# EAGLE board cap_touch_input (EAGLE 5.06)
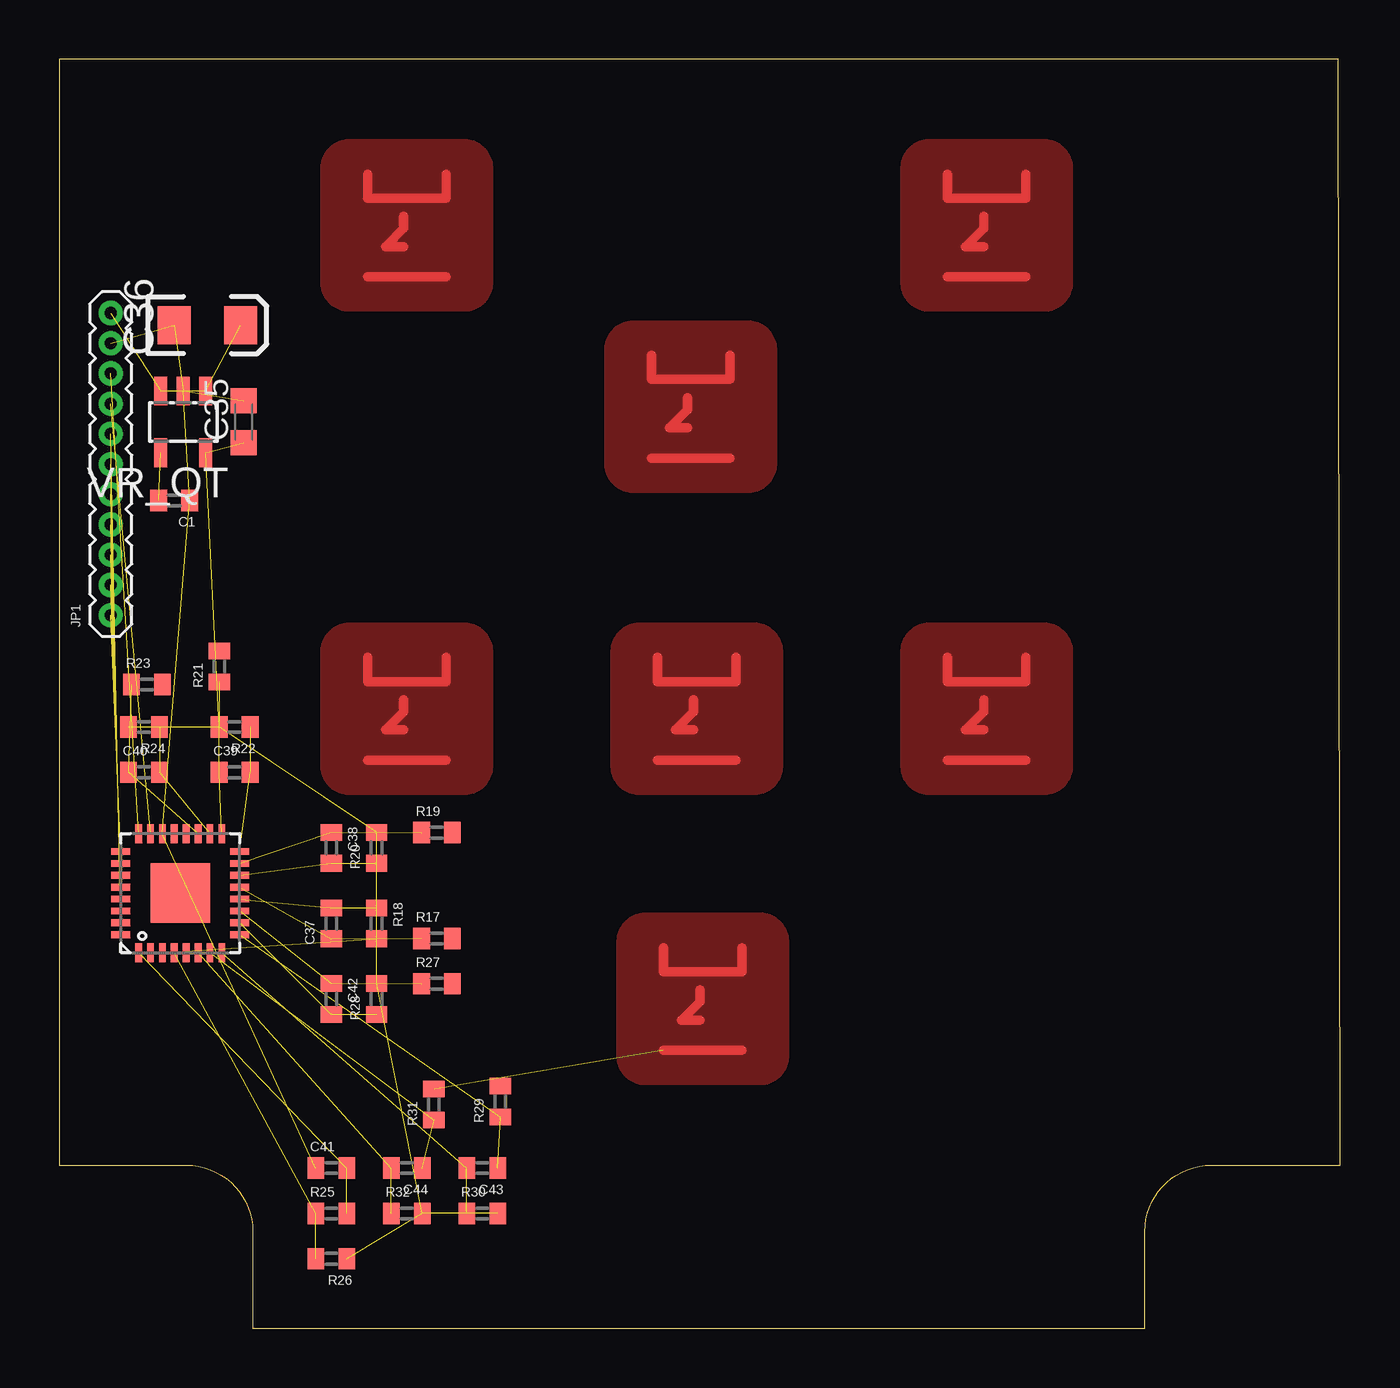
[diagram p0: board, top side]

Size 53.85 x 53.33 mm. Coordinates in mm from the lower left corner, seen from the top.
Outline: 8.13,0 45.64,0 45.64,4.06 arc-90 48.44,6.86 53.85,6.86 53.77,53.33 0,53.33 0,6.86 5.33,6.86 arc-90 8.13,4.06 8.13,0
Copper layers (1*16): Top 0.035mm / dielectric 1.5mm / Bottom 0.035mm
Design rules "default *": minimum track width 10mil, minimum drill 24mil, track to track 8mil, track to pad 8mil, pad to pad 8mil, via to via 8mil, smd to smd 8mil, copper to edge 20mil, drill to drill 8mil, minimum pad ring 10mil, minimum via ring 8mil, stop-mask expansion 4mil, vias tented up to drill 0mil, thermal gap 10mil

## Footprints (pad centres in the part's own frame; a part is rotated, then mirrored left to right if it is on the bottom)
C0402 = smd 0.7 x 0.9: 1 -0.65,0; 2 0.65,0
C0603K = smd 1.05 x 1.08: 1 -0.875,0; 2 0.875,0
EIA3216 = smd 1.4 x 1.6: A 1.4,0; C -1.4,0
QFN-32 = smd 0.285 x 0.8: 1 -1.75,-2.5; 2 -1.25,-2.5; 3 -0.75,-2.5; 4 -0.25,-2.5; 5 0.25,-2.5; 6 0.75,-2.5; 7 1.25,-2.5; 8 1.75,-2.5; 17 1.75,2.5; 18 1.25,2.5; 19 0.75,2.5; 20 0.25,2.5; 21 -0.25,2.5; 22 -0.75,2.5; 23 -1.25,2.5; 24 -1.75,2.5 | smd 0.8 x 0.285: 9 2.5,-1.75; 10 2.5,-1.25; 11 2.5,-0.75; 12 2.5,-0.25; 13 2.5,0.25; 14 2.5,0.75; 15 2.5,1.25; 16 2.5,1.75; 25 -2.5,1.75; 26 -2.5,1.25; 27 -2.5,0.75; 28 -2.5,0.25; 29 -2.5,-0.25; 30 -2.5,-0.75; 31 -2.5,-1.25; 32 -2.5,-1.75 | smd 2.5 x 2.5: BACKPLANE 0,0
1X11-1.27MM = drill 0.508 pad 1 round: 1 0,0; 2 1.27,0; 3 2.54,0; 4 3.81,0; 5 5.08,0; 6 6.35,0; 7 7.62,0; 8 8.89,0; 9 10.16,0; 10 11.43,0; 11 12.7,0
SOT23-5 = smd 0.55 x 1.2: 1 -0.95,-1.3; 2 0,-1.3; 3 0.95,-1.3; 4 0.95,1.3; 5 -0.95,1.3

## Placement (x,y rotation side)
C1  470pF  [C0402]  4.83,34.8 180 top
C35  2.2uF (TANT)  [C0603K]  7.75,38.1 90 top
C36  10uF  [EIA3216]  6.22,42.16 0 top
C37  1nF  [C0402]  11.43,17.02 90 top
C38  1nF  [C0402]  11.43,20.19 270 top
C39  1nF  [C0402]  7.37,23.37 0 top
C40  1nF  [C0402]  3.56,23.37 0 top
C41  1nF  [C0402]  11.43,6.73 0 top
C42  1nF  [C0402]  11.43,13.84 270 top
C43  1nF  [C0402]  17.78,6.73 180 top
C44  1nF  [C0402]  14.61,6.73 180 top
IC1  QT1081  [QFN-32]  5.08,18.29 0 top
JP1  M111.27MM  [1X11-1.27MM]  2.16,29.97 90 top
R17  10K  [C0402]  15.88,16.38 0 top
R18  1M  [C0402]  13.34,17.02 270 top
R19  10K  [C0402]  15.88,20.83 0 top
R20  1M  [C0402]  13.34,20.19 90 top
R21  10K  [C0402]  6.73,27.81 90 top
R22  1M  [C0402]  7.37,25.27 180 top
R23  10K  [C0402]  3.68,27.05 0 top
R24  1M  [C0402]  3.56,25.27 180 top
R25  1M  [C0402]  11.43,4.83 0 top
R26  1M  [C0402]  11.43,2.92 180 top
R27  10K  [C0402]  15.88,14.48 0 top
R28  1M  [C0402]  13.34,13.84 90 top
R29  10K  [C0402]  18.54,9.53 90 top
R30  1M  [C0402]  17.78,4.83 0 top
R31  10K  [C0402]  15.75,9.4 90 top
R32  1M  [C0402]  14.61,4.83 0 top
VR_QT  MIC5205  [SOT23-5]  5.21,38.1 180 top

## Library data of the parts
C1 C37-C44 JP1 R17-R32 = SparkFun
C35 = rcl
C36 VR_QT = SparkFun-3-2-07
IC1 = qtouch

## Nets
KEY0: R31.2
KEY1: R29.2
KEY2: R27.2
KEY3: R17.2
KEY4: R19.2
KEY5: R21.2
KEY6: R23.2
OSC: IC1.4 R25.1 R26.2
QT_GND: C1.1 C35.2 C36.C C41.1 IC1.22 JP1.10 VR_QT.2
QT_OUT0: IC1.25 JP1.1
QT_OUT1: IC1.26 JP1.2
QT_OUT2: IC1.27 JP1.3
QT_OUT3: IC1.28 JP1.4
QT_OUT4: IC1.29 JP1.5
QT_OUT5: IC1.30 JP1.6
QT_OUT6: IC1.31 JP1.7
QT_VBAT: C36.A JP1.11 VR_QT.1 VR_QT.3
QT_VCC: C35.1 IC1.2 IC1.3 R18.2 R20.2 R22.2 R24.2 R26.1 R28.2 R30.2 R32.2 VR_QT.5
QTC_DETECT: IC1.24 JP1.9
QTC_LP: IC1.23 JP1.8
SNS0: C44.2 IC1.6 R32.1
SNS0K: C44.1 IC1.7 R31.1
SNS1: C43.2 IC1.8 R30.1
SNS1K: C43.1 IC1.9 R29.1
SNS2: C42.2 IC1.10 R28.1
SNS2K: C42.1 IC1.11 R27.1
SNS3: C37.2 IC1.12 R18.1
SNS3K: C37.1 IC1.13 R17.1
SNS4: C38.2 IC1.14 R20.1
SNS4K: C38.1 IC1.15 R19.1
SNS5: C39.2 IC1.16 R22.1
SNS5K: C39.1 IC1.17 R21.1
SNS6: C40.2 IC1.18 R24.1
SNS6K: C40.1 IC1.19 R23.1
SS: C41.2 IC1.1 R25.2
VRQT_BP: C1.2 VR_QT.4

## Tracks (layer width: path | path; a pad name or v marks a point on that pad's centre or on a via)
KEY0  (1 unrouted)
  Top 0.406: 25.4,11.68 28.7,11.68 | 26.92,14.22 26.92,13.72 26.16,12.95 26.92,12.95 | 25.4,16 25.4,14.99 28.7,14.99 28.7,16
  pour Top: 24.64,17.27 arc90 23.62,16.26 23.62,11.43 arc90 24.64,10.41 29.46,10.41 arc90 30.48,11.43 30.48,16.26 arc90 29.46,17.27
KEY7
  Top 0.406: 25.15,23.88 28.45,23.88 | 26.67,26.42 26.67,25.91 25.91,25.15 26.67,25.15 | 25.15,28.19 25.15,27.18 28.45,27.18 28.45,28.19
  pour Top: 24.38,29.46 arc90 23.37,28.45 23.37,23.62 arc90 24.38,22.61 29.21,22.61 arc90 30.23,23.62 30.23,28.45 arc90 29.21,29.46
KEY8
  Top 0.406: 37.34,23.88 40.64,23.88 | 38.86,26.42 38.86,25.91 38.1,25.15 38.86,25.15 | 37.34,28.19 37.34,27.18 40.64,27.18 40.64,28.19
  pour Top: 36.58,29.46 arc90 35.56,28.45 35.56,23.62 arc90 36.58,22.61 41.4,22.61 arc90 42.42,23.62 42.42,28.45 arc90 41.4,29.46
KEY9
  Top 0.406: 12.95,23.88 16.26,23.88 | 14.48,26.42 14.48,25.91 13.72,25.15 14.48,25.15 | 12.95,28.19 12.95,27.18 16.26,27.18 16.26,28.19
  pour Top: 12.19,29.46 arc90 11.18,28.45 11.18,23.62 arc90 12.19,22.61 17.02,22.61 arc90 18.03,23.62 18.03,28.45 arc90 17.02,29.46
KEY10
  Top 0.406: 24.89,36.58 28.19,36.58 | 26.42,39.12 26.42,38.61 25.65,37.85 26.42,37.85 | 24.89,40.89 24.89,39.88 28.19,39.88 28.19,40.89
  pour Top: 24.13,42.16 arc90 23.11,41.15 23.11,36.32 arc90 24.13,35.31 28.96,35.31 arc90 29.97,36.32 29.97,41.15 arc90 28.96,42.16
KEY11
  Top 0.406: 37.34,44.2 40.64,44.2 | 38.86,46.74 38.86,46.23 38.1,45.47 38.86,45.47 | 37.34,48.51 37.34,47.5 40.64,47.5 40.64,48.51
  pour Top: 36.58,49.78 arc90 35.56,48.77 35.56,43.94 arc90 36.58,42.93 41.4,42.93 arc90 42.42,43.94 42.42,48.77 arc90 41.4,49.78
KEY12
  Top 0.406: 12.95,44.2 16.26,44.2 | 14.48,46.74 14.48,46.23 13.72,45.47 14.48,45.47 | 12.95,48.51 12.95,47.5 16.26,47.5 16.26,48.51
  pour Top: 12.19,49.78 arc90 11.18,48.77 11.18,43.94 arc90 12.19,42.93 17.02,42.93 arc90 18.03,43.94 18.03,48.77 arc90 17.02,49.78
OSC  (2 unrouted)
QT_GND  (6 unrouted)
QT_OUT0  (1 unrouted)
QT_OUT1  (1 unrouted)
QT_OUT2  (1 unrouted)
QT_OUT3  (1 unrouted)
QT_OUT4  (1 unrouted)
QT_OUT5  (1 unrouted)
QT_OUT6  (1 unrouted)
QT_VBAT  (3 unrouted)
QT_VCC  (11 unrouted)
QTC_DETECT  (1 unrouted)
QTC_LP  (1 unrouted)
SNS0  (2 unrouted)
SNS0K  (2 unrouted)
SNS1  (2 unrouted)
SNS1K  (2 unrouted)
SNS2  (2 unrouted)
SNS2K  (2 unrouted)
SNS3  (2 unrouted)
SNS3K  (2 unrouted)
SNS4  (2 unrouted)
SNS4K  (2 unrouted)
SNS5  (2 unrouted)
SNS5K  (2 unrouted)
SNS6  (2 unrouted)
SNS6K  (2 unrouted)
SS  (2 unrouted)
VRQT_BP  (1 unrouted)